# EAGLE board bai2-piano (EAGLE 9.7.0)

Size 174.81 x 85.74 mm. Coordinates in mm from the lower left corner, seen from the top.
Outline: 0,0 174.81,0 174.81,85.74 0,85.74 0,0
Copper layers (1*16): Top 0.035mm / dielectric 1.5mm / Bottom 0.035mm
Design rules "default": minimum track width 6mil, minimum drill 0.35mm, track to track 6mil, track to pad 6mil, pad to pad 6mil, via to via 6mil, smd to smd 6mil, copper to edge 40mil, drill to drill 6mil, minimum pad ring 10mil, minimum via ring 8mil, stop-mask expansion 4mil, vias tented up to drill 0mil, thermal gap 10mil

## Footprints (pad centres in the part's own frame; a part is rotated, then mirrored left to right if it is on the bottom)
CAP-THRU-2.54MM = drill 1.016 pad 1.88: 1 -1.27,0; 2 1.27,0
BATTERY-GENERIC = drill 1.118 pad 3.15 octagon: + 2.54,0; - -2.54,0
PIEZO = drill 1 pad 1.6: 1 -3.5,0; 2 3.5,0
RESAD1016W63L850D250B = drill 0.83 pad 1.43: 1 -5.08,0; 2 5.08,0
SWITCH-MOMENTARY-PTH-6.5MM = drill 1.016 pad 1.88: 1 -3.251,2.261; 2 3.251,2.261; 3 -3.251,-2.261; 4 3.251,-2.261
DIP826W53P254L959H508Q8B = drill 0.786 pad 1.386: 1 -4.13,3.81; 2 -4.13,1.27; 3 -4.13,-1.27; 4 -4.13,-3.81; 5 4.13,-3.81; 6 4.13,-1.27; 7 4.13,1.27; 8 4.13,3.81

## Placement (x,y rotation side)
C1  100n  [CAP-THRU-2.54MM]  157.42,15.54 0 top
P1  BATTERYGENERIC  [BATTERY-GENERIC]  8.26,77.49 180 top
PIEZO1  PIEZO  [PIEZO]  161.23,11.73 270 top
R1  2k  [RESAD1016W63L850D250B]  31.69,40.95 0 top
R2  1k  [RESAD1016W63L850D250B]  41.85,38.41 0 top
R3  1.5k  [RESAD1016W63L850D250B]  52.01,40.95 0 top
R4  2k  [RESAD1016W63L850D250B]  62.17,38.41 0 top
R5  3k  [RESAD1016W63L850D250B]  72.33,40.95 0 top
R6  6k  [RESAD1016W63L850D250B]  82.49,38.41 0 top
R7  1k  [RESAD1016W63L850D250B]  158.69,43.48 90 top
S1  SWITCH_MOMENTARY  [SWITCH-MOMENTARY-PTH-6.5MM]  24.07,26.98 90 top
S2  SWITCH_MOMENTARY  [SWITCH-MOMENTARY-PTH-6.5MM]  34.23,26.98 90 top
S3  SWITCH_MOMENTARY  [SWITCH-MOMENTARY-PTH-6.5MM]  44.39,26.98 90 top
S4  SWITCH_MOMENTARY  [SWITCH-MOMENTARY-PTH-6.5MM]  54.55,26.98 90 top
S5  SWITCH_MOMENTARY  [SWITCH-MOMENTARY-PTH-6.5MM]  64.71,26.98 90 top
S6  SWITCH_MOMENTARY  [SWITCH-MOMENTARY-PTH-6.5MM]  74.87,26.98 90 top
U2  LM555_DIP  [DIP826W53P254L959H508Q8B]  159.96,26.98 90 top

## Library data of the parts
C1 P1 PIEZO1 R1-R7 S1-S6 = Tinkercad
U2 = Tinkercad; CATEGORY: IC_Clock-Timing; CURRENT-SUPPLY: 10mA; DESCRIPTION: IC OSC SINGLE TIMER 100KHZ 8-DIP; FREQUENCY: 100kHz; MANUFACTURER: Texas Instruments; MPN: LM555CN/NOPB; OPERATING_TEMP: 0°C to 70°C; PART_STATUS: Active; ROHS_COMPLIANT: ROHS3 Compliant; SUB-CATEGORY: Timer

## Nets
P1+: P1.+ R7.2 U2.4 U2.8
P1-: C1.1 P1.- PIEZO1.2 U2.1
S1_3: R1.1 S1.3 S1.4
S2_3: R1.2 R2.1 S2.3 S2.4
S3_3: R2.2 R3.1 S3.3 S3.4
S4_3: R3.2 R4.1 S4.3 S4.4
S5_3: R4.2 R5.1 S5.3 S5.4
S6_3: R5.2 R6.1 S6.3 S6.4
U2_DIS: R6.2 R7.1 U2.7
U2_OUT: PIEZO1.1 U2.3
U2_THR: C1.2 S1.1 S1.2 S2.1 S2.2 S3.1 S3.2 S4.1 S4.2 S5.1 S5.2 S6.1 S6.2 U2.2 U2.6

## Tracks (layer width: path | path; a pad name or v marks a point on that pad's centre or on a via)
P1+  (3 unrouted)
P1-  (3 unrouted)
S1_3  (2 unrouted)
S2_3  (3 unrouted)
S3_3  (3 unrouted)
S4_3  (3 unrouted)
S5_3  (3 unrouted)
S6_3  (3 unrouted)
U2_DIS  (2 unrouted)
U2_OUT  (1 unrouted)
U2_THR  (14 unrouted)